# EAGLE board fascias_v2.1.0_dxf_prepare_r2 (EAGLE 9.6.2)

Size 252.1 x 140.3 mm. Coordinates in mm from the lower left corner, seen from the top.
Outline: 172.9,74.2 207.9,74.2 207.9,73.7 173.4,73.7 173.4,57.7 207.9,57.7 207.9,57.2 172.9,57.2
Outline: 225.9,74.2 208.9,74.2 208.9,73.7 225.4,73.7 225.4,57.7 208.9,57.7 208.9,57.2 225.9,57.2
Outline: 225.9,73.7 225.9,58.7
Outline: 172.9,58.2 172.9,73.2
Outline: 190.9,124.2 190.9,117.2
Outline: 179.9,124.2 179.9,117.2
Outline: 201.9,124.2 201.9,117.2
Outline: 233.9,124.2 233.9,116.7
Outline: 216.9,124.2 216.9,116.7
Outline: 245.9,124.2 245.9,116.7
Outline: 248,92.3 arc-90 251.6,88.8 251.6,51.6 arc-90 248,48 163.8,48 arc-90 160.2,51.5 160.2,88.7 arc-90 163.7,92.3 248,92.3
Outline: 204.7,125.2 215.1,125.2 215.1,129.2 204.7,129.2 204.7,125.2
Outline: 248,140.3 arc-90 251.6,136.8 251.6,99.6 arc-90 248,96 163.8,96 arc-90 160.2,99.5 160.2,136.7 arc-90 163.7,140.3 248,140.3
Outline: 179.9,125.2 201.9,125.2 201.9,132.95 179.9,132.95 179.9,125.2
Outline: 217.4,125.2 245.9,125.2 245.9,132.95 233.9,132.95 233.9,137.2 217.4,137.2 217.4,125.2
Outline: 189.9,101.7 219.4,101.7 219.4,104.7 189.9,104.7 189.9,101.7
Outline: 79.99,0.1 153.99,0.1 153.99,85.1 79.99,85.1 79.99,0.1
Outline: 248.5,44.3 arc-90 252.1,40.8 252.1,3.6 arc-90 248.5,0 164.3,0 arc-90 160.7,3.5 160.7,40.7 arc-90 164.2,44.3 248.5,44.3
Outline: 74,85.2 0,85.2 0,0.2 74,0.2 74,85.2
Outline: circle at 172.9,79.7 radius 3.04
Outline: circle at 170.9,131.7 radius 3.5
Outline: circle at 185.9,79.7 radius 3.04
Outline: circle at 198.9,79.7 radius 3.04
Outline: circle at 212.9,79.7 radius 3.04
Outline: circle at 225.9,79.7 radius 3.04
Outline: circle at 238.9,79.7 radius 3.04
Outline: circle at 163.76,136.8 radius 1.7
Outline: circle at 248.08,136.77 radius 1.7
Outline: circle at 248.1,99.56 radius 1.7
Outline: circle at 163.76,99.56 radius 1.7
Outline: circle at 163.77,88.77 radius 1.7
Outline: circle at 163.76,51.55 radius 1.7
Outline: circle at 248.09,51.56 radius 1.7
Outline: circle at 248.09,88.77 radius 1.7
Outline: circle at 173.4,31.7 radius 3.04
Outline: circle at 186.4,31.7 radius 3.04
Outline: circle at 199.4,31.7 radius 3.04
Outline: circle at 213.4,31.7 radius 3.04
Outline: circle at 226.4,31.7 radius 3.04
Copper layers (1*16): Top 8mil / dielectric 8mil / Bottom 8mil
Design rules "default *": minimum track width 8mil, minimum drill 0.5mm, track to track 8mil, track to pad 8mil, pad to pad 8mil, via to via 8mil, smd to smd 8mil, copper to edge 10mil, drill to drill 8mil, minimum pad ring 8mil, minimum via ring 8mil, stop-mask expansion 0.075mm, vias tented up to drill 0.6mm, thermal gap 8mil
Net classes: 0 default: width 0.203 mm, drill 0.6 mm, clearance 0.203 mm; 1 power: width 0.305 mm, drill 0.6 mm, clearance 0.254 mm; 2 gnd: width 0.254 mm, drill 0.6 mm, clearance 0.254 mm; 3 5V0_PI: width 0.406 mm, drill 0.4 mm; 4 3V3_PI: width 0.254 mm, drill 0.4 mm

## Placement (x,y rotation side)
LOGO3  OSHW_LOGO_10MILX0200-NT  [OSHW_10X200_NOTEXT]  236.06,64.13 0 top

## Library data of the parts
LOGO3 = ohw-logo

## Text on the board
Dimension: Temperature | GND | 3V3 | GND | 3V3 | GND | 3V3 | emonVS | 433 / Mhz | USB | voltage / sensor | emon | SD CARD | 333 mV CT Sensors | CT 1 | CT 2 | CT 3 | CT 4 | CT 5 | CT 6 | OPEN / HARDWARE | Open | .org | CT 1 | CT 2 | CT 3 | CT 4 | CT 5 | CT 6 | CT 7 | CT 8 | CT 9 | CT 10 | CT 11 | CT 12 | Open | .org
_tsilk: Designed in | North Wales | Made in UK
_bsilk: 165mm ant | 433Mhz | 165mm ant | 165mm ant | 433Mhz | 433Mhz | 868Mhz | 82mm ant | 82mm ant | 82mm ant | 868Mhz | 868Mhz | 78mm ant | 915Mhz | 78mm ant | 915Mhz | 78mm ant | 915Mhz | 165mm ant | 433Mhz | 82mm ant | 868Mhz | 78mm ant | 915Mhz
OEM_BLUE: DAT | DAT | ADC | Pi2 | EnergyMonitor | EnergyMonitor
OEM3: emonPi2 | OpenEnergyMonitor.org